# Altium PCB PCB3.PcbDoc
Units mm, origin at the board's own origin, x right, y up, seen from the top; angles counter-clockwise.
Board outline 78.87 x 97.54 mm, 2 copper layers (Top Layer, Bottom Layer); 18 components, 22 nets, 80 pads, 0 vias.
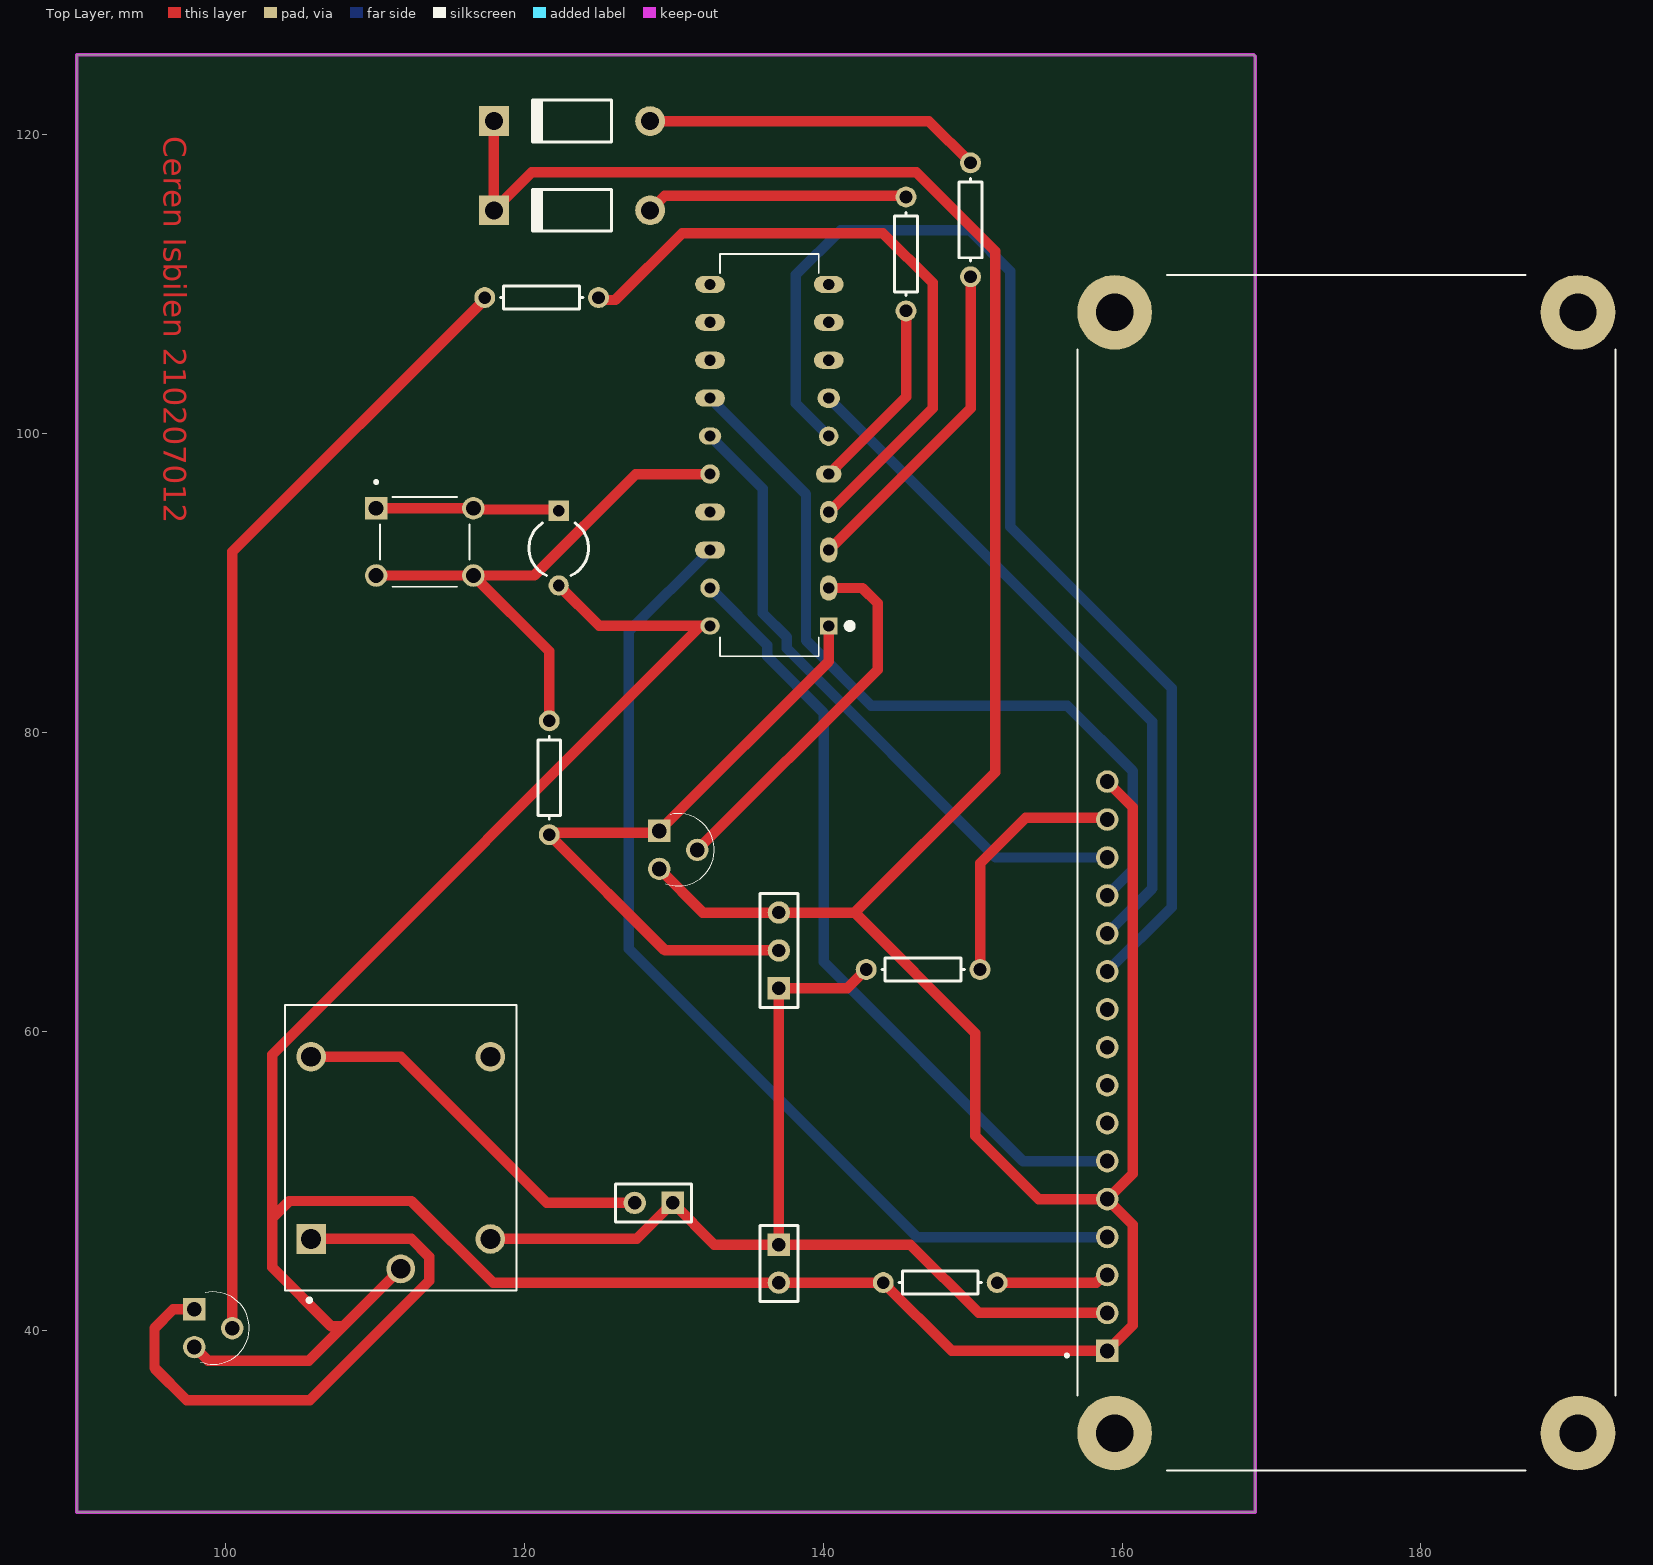
[diagram p0: Top Layer view]
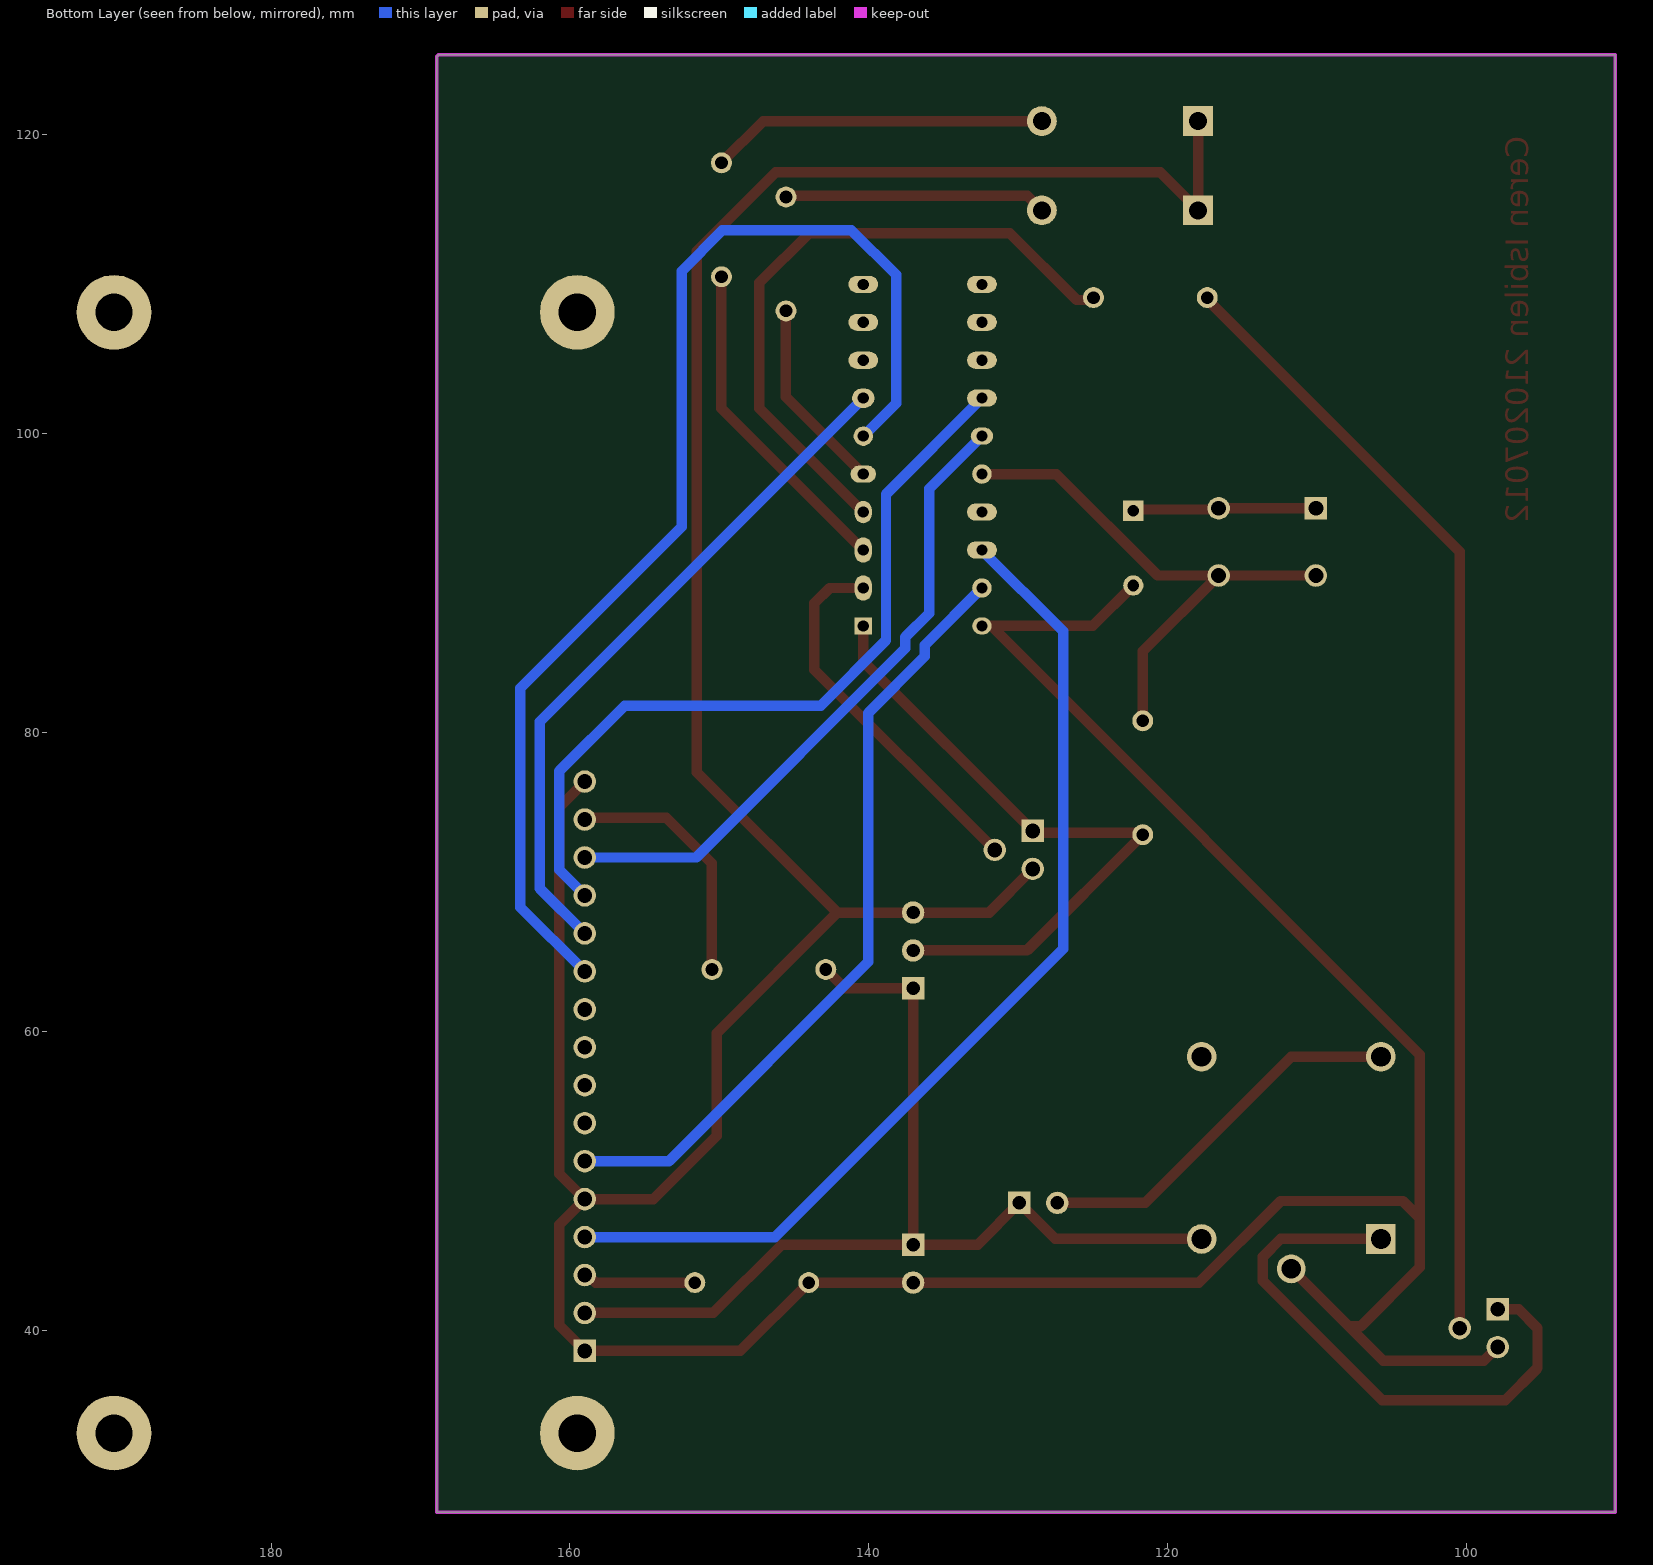
[diagram p1: Bottom Layer view, seen from below]

## Layer stack, top to bottom
Top Solder: solder mask 0.0102, Solder Resist, Dk 3.5
Top Layer: signal copper 0.0356
Dielectric 1: dielectric 0.32, FR-4, Dk 4.8
Bottom Layer: signal copper 0.0356
Bottom Solder: solder mask 0.0102, Solder Resist, Dk 3.5

## Board outline
90.043,27.813 168.91,27.813 168.91,125.222 168.783,125.349 90.043,125.349

## Design rules (kind name [scope] priority, off if disabled: settings)
Clearance [All] p1: gap=0.6 ignorepadtopadclearanceinfootprint=FALSE
PolygonConnect [All] p1: connectstyle=Relief reliefconductorwidth=0.254 reliefentries=4 polygonreliefangle="90 Angle" airgapwidth=0.254
RoutingVias [All] p1: holewidth=0.711 width=1.27 viastyle="Through Hole" minholewidth=0.711 minwidth=1.27 maxholewidth=0.711 maxwidth=1.27
SolderMaskExpansion [All] p1: expansion=0.102 istentingtop=FALSE
Width [All] p1: maxlimit=0.8 minlimit=0.5 preferedwidth=0.7 minimp=50.000000 maximp=50.000000 favimp=50.000000
30 further rules are at their usual default settings.

## Classes and differential pairs
component class Sheet1: " "

## Components (designator, comment, footprint, x,y, rotation, side; value= is the part's Value field where it differs from the comment)
5V_3V3D "Header 3" HDR1X3 137.033,62.865 r90 top
5V_Header "Header 2" HDR1X2 137.033,45.72 r270 top
bc547 "BC547B" TO127P254X732-3 100.457,38.862 r270 top
Buton "TS02-66-95-BK-260-LCR-D" SW_TS02-66-95-BK-260-LCR-D 113.336,92.746 r0 top
C1 "Cap2" CAPR5-4X5 122.301,92.329 r270 top value=100pF
D_Arm "Diode 1N4007" DO-41 123.19,114.935 r180 top
D_Led "Diode 1N4007" DO-41 123.19,120.904 r180 top
Fan_header "Header 2" HDR1X2 129.921,48.514 r180 top
Isı_Sensor "MCP9700" TO127P254X732-3 131.572,70.866 r270 top
LCD3 "" AXIAL-0.3 147.828,43.18 r0 top value=2.2
LCD15 "Res1" AXIAL-0.3 146.685,64.135 r180 top value=33
MSP "MSP430G2553IN20" DIP794W45P254L2692H508Q20 136.398,98.552 r180 top
R_BC "Res1" AXIAL-0.3 121.158,109.093 r0 top value=4.7K
R_Led11 "Res1" AXIAL-0.3 149.86,114.3 r90 top value=1K
R_Led13 "Res1" AXIAL-0.3 145.542,112.014 r90 top value=1K
R_rst "Res1" AXIAL-0.3 121.666,76.962 r270 top value=1K
Role "SRD-05VDC-SL-C" RELAY_SRD-05VDC-SL-C 111.729,52.201 r90 top
U1 "LCD2X16" LCD_LCD2X16 175.004,70.608 r90 top

## Footprints (in the part's own frame and the unit in brackets; to place one, negate y for a bottom-side part, rotate by r counter-clockwise, add the part's x,y. Pads: shape width x height; smd on the part's side, far side on the other; paste and mask are expansions set on the pad)
AXIAL-0.3 [mm] "Axial Device, Thru-Hole; 2 Leads; 0.3 in Pin Spacing"
  round 1.4 hole 0.85: 1(-3.81,0) 2(3.81,0)
  silkscreen extent -2.77,-0.76 2.77,0.76
CAPR5-4X5 [mm] "Capacitor; 2 Leads"
  rect 1.35x1.35 hole 0.8: 1(-2.5,0)
  round 1.35 hole 0.8: 2(2.5,0)
  silkscreen extent -1.69,-2 1.82,2
DIP794W45P254L2692H508Q20 [mm]
  rect 1.14x1.14 hole 0.74: 1(-3.97,11.43)
  oval 1.14x1.7 hole 0.74: 2(-3.97,8.89) 3(-3.97,6.35)
  oval 1.14x1.5 hole 0.74: 4(-3.97,3.81)
  oval 1.7x1.14 hole 0.74: 5(-3.97,1.27)
  round 1.3 hole 0.74: 6(-3.97,-1.27) 16(3.97,1.27) 19(3.97,8.89)
  oval 1.5x1.3 hole 0.74: 7(-3.97,-3.81)
  oval 2x1.14 hole 0.74: 8(-3.97,-6.35) 9(-3.97,-8.89) 10(-3.97,-11.43) 11(3.97,-11.43) 12(3.97,-8.89) 13(3.97,-6.35) 14(3.97,-3.81) 17(3.97,3.81) 18(3.97,6.35)
  oval 1.5x1.14 hole 0.74: 15(3.97,-1.27)
  oval 1.3x1.14 hole 0.74: 20(3.97,11.43)
  silkscreen extent -5.57,-13.46 3.3,13.46
DO-41 [mm] "Diode, Axial; Body 5.2 x 2.7 mm (LxDia. max), Lead Dia. 0.86 mm (max)"
  round 2 hole 1.2: 1(-5.23,0)
  rect 2x2 hole 1.2: 2(5.23,0)
  silkscreen extent -2.65,-1.4 2.75,1.4
HDR1X2 [mm] "Connector; Header; 2 Position"
  rect 1.5x1.5 hole 0.9: 1(0,0)
  round 1.5 hole 0.9: 2(2.54,0)
  silkscreen extent -1.27,-1.27 3.81,1.27
HDR1X3 [mm] "Connector; Header; 3 Position"
  rect 1.5x1.5 hole 0.9: 1(0,0)
  round 1.5 hole 0.9: 2(2.54,0) 3(5.08,0)
  silkscreen extent -1.27,-1.27 6.35,1.27
LCD_LCD2X16 [mm]
  rect 1.508x1.508 hole 1: 1(-32,16)
  round 1.508 hole 1: 2(-29.46,16) 3(-26.92,16) 4(-24.38,16) 5(-21.84,16) 6(-19.3,16) 7(-16.76,16) 8(-14.22,16) 9(-11.68,16) 10(-9.14,16) 11(-6.6,16) 12(-4.06,16) 13(-1.52,16) 14(1.02,16) 15(3.56,16) 16(6.1,16)
  round 5 hole 2.5: S1(-37.5,15.5) S2(37.5,15.5) S3(37.5,-15.5) S4(-37.5,-15.5)
  silkscreen extent -40,-18 40,18.8, body extent -40,-18 40,18, height 7
RELAY_SRD-05VDC-SL-C [mm]
  rect 1.98x1.98 hole 1.32: A1(-6.1,6)
  round 1.98 hole 1.32: A2(-6.1,-6) NC(6.1,6) NO(6.1,-6)
  round 1.935 hole 1.29: COM(-8.1,0)
  silkscreen extent -10.3,-7.75 9.55,7.75, body extent -9.6,-7.8 9.6,7.8, height 15.8
SW_TS02-66-95-BK-260-LCR-D [mm]
  rect 1.508x1.508 hole 1: 1(-3.25,2.25)
  round 1.508 hole 1: 2(3.25,2.25) 3(-3.25,-2.25) 4(3.25,-2.25)
  silkscreen extent -3.35,-3 3,4.1, body extent -3.95,-3 3.95,3, height 9.7
TO127P254X732-3 [mil]
  rect 59x59 hole 39: 1(-100,-100)
  round 59 hole 39: 2(-50,0) 3(0,-100)
  silkscreen extent -146,-83 45,45, body extent -93,-71 93,71, height 210

## Part data
5V_3V3D: "Header, 3-Pin", LatestRevisionDate=17-Jul-2002, LatestRevisionNote="Re-released for DXP Platform.", Publisher="Altium Limited"
5V_Header Fan_header: "Header, 2-Pin", LatestRevisionDate=17-Jul-2002, LatestRevisionNote="Re-released for DXP Platform.", Publisher="Altium Limited"
bc547: "NPN Epitaxial Silicon Transistor", Package=None, Availability=Unavailable, MF="{'manufacturer': u'ON Semiconductor'}", MP=BC547B, Price=None
Buton: Package=None, Availability=Unavailable, MF="{'manufacturer': u'CUI Devices'}", MP=TS02-66-95-BK-260-LCR-D, Price=None
C1: "Capacitor", PackageDescription="Capacitor; 2 Leads", PackageReference=CAPR5-4X5, Published=23-Sep-2002, Publisher="Altium Limited"
D_Arm D_Led: "1 Amp General Purpose Rectifier", Code_JEDEC=DO-204-AL, ComponentLink1Description="Manufacturer Link", ComponentLink1URL=http://www.fairchildsemi.com/, ComponentLink2Description=Datasheet, ComponentLink2URL=http://www.fairchildsemi.com/ds/1N%2F1N4001.pdf, DatasheetVersion=1998, LatestRevisionDate=17-Jul-2002, LatestRevisionNote="Re-released for DXP Platform.", PackageDescription="Diode, Axial; Body 5.2 x 2.7 mm (LxDia. max), Lead Dia. 0.86 mm (max)", PackageReference=DO-41, PackageVersion=Aug-1999, Published=8-Jun-2000, Publisher="Altium Limited"
Isı_Sensor: library part BC547B, "NPN Epitaxial Silicon Transistor", Package=None, Availability=Unavailable, MF="{'manufacturer': u'ON Semiconductor'}", MP=BC547B, Price=None
LCD3: library part Res1, "Resistor", LatestRevisionDate=17-Jul-2002, LatestRevisionNote="Re-released for DXP Platform.", PackageDescription="Axial Device, Thru-Hole; 2 Leads; 0.3 in Pin Spacing", PackageReference=AXIAL-0.3, Published=8-Jun-2000, Publisher="Altium Limited"
LCD15 R_BC R_Led11 R_Led13 R_rst: "Resistor", LatestRevisionDate=17-Jul-2002, LatestRevisionNote="Re-released for DXP Platform.", PackageDescription="Axial Device, Thru-Hole; 2 Leads; 0.3 in Pin Spacing", PackageReference=AXIAL-0.3, Published=8-Jun-2000, Publisher="Altium Limited"
MSP: "MSP430G2x53, MSP430G2x13 Mixed Signal Microcontroller 20-PDIP -40 to 85", Package=None, Availability=Unavailable, MF="{'manufacturer': u'Texas Instruments'}", MP=MSP430G2553IN20, Price=None
Role: "5V Trigger Relay Module For Arduino And Raspberry Pi 5V Trigger Relay Module For Arduino And Raspberry Pi", Package=None, Availability=Unavailable, MF="{'manufacturer': u'Songle Relay'}", MP=SRD-05VDC-SL-C, Price=None
U1: "Display; Display: LCD 2x16 characters (blue backlight)", Package=None, Availability=Unavailable, MF="{'manufacturer': u'mikroElektronika'}", MP=LCD2X16, Price=None

## Nets (pads, with @x,y where several pads share a name; then routed paths per layer and width w, separated by ;. In a path a pad name is that pad's centre, name@x,y a point inside that pad or via, vN(x,y) a via of type N, cw(c..) or ccw(c..) an arc to the next point about the centre after c; other vN are vias at no path point)
3V3: 5V_3V3D.2 Isı_Sensor.1 MSP.1 R_rst.2 | length 44.5
  Top Layer w0.7: 5V_3V3D.2 129.413,65.405 R_rst.2 121.793,73.279 128.905,73.279 Isı_Sensor.1 140.368,84.742 MSP.1
+5: 5V_3V3D.1 5V_Header.1 Fan_header.1 LCD15.2 Role.A2 U1.2 | length 68.8
  Top Layer w0.7: Role.A2 127.508,46.101 Fan_header.1 132.715,45.72 5V_Header.1 ; LCD15.2 141.605,62.865 5V_3V3D.1 5V_Header.1 ; U1.2 150.395,41.148 145.823,45.72 5V_Header.1
But1: Buton.1 Buton.2 C1.1 | length 12.3
  Top Layer w0.7: Buton.1 Buton.2 116.669,94.913 122.218,94.913 C1.1
GND: 5V_3V3D.3 5V_Header.2 bc547.3 C1.2 D_Arm.2 D_Led.2 Isı_Sensor.3 LCD3.1 MSP.20 Role.COM U1.1 U1.5 U1.16 | length 324.6
  Top Layer w0.7: bc547.3 98.834,37.945 105.573,37.945 107.791,40.164 ; Role.COM 107.791,40.164 ; D_Led.2 D_Arm.2 120.499,117.474 146.225,117.474 151.51,112.189 151.51,77.342 142.113,67.945 ; C1.2 125.008,87.122 MSP.20@131.806,87.122 ; Isı_Sensor.3 131.953,67.945 5V_3V3D.3 142.113,67.945 ; MSP.20 MSP.20@131.806,87.122 ; U1.16 160.708,75.004 160.708,50.472 U1.5 ; 103.124,47.498 103.124,58.44 MSP.20@131.806,87.122 ; 103.124,47.498 103.124,44.196 107.061,40.259 107.696,40.259 107.791,40.164 ; 103.124,47.498 104.267,48.641 112.445,48.641 117.906,43.18 5V_Header.2 LCD3.1 148.59,38.608 U1.1 160.708,40.312 160.708,47.064 U1.5 ; 142.113,67.945 150.178,59.88 150.178,53.022 154.432,48.768 U1.5
Netbc547_1: bc547.1 Role.A1 | length 38.5
  Top Layer w0.7: bc547.1 96.52,41.402 95.25,40.132 95.25,37.465 97.403,35.312 105.652,35.312 113.646,43.307 113.646,44.895 112.441,46.101 Role.A1
Netbc547_2: bc547.2 R_BC.1 | length 75.8
  Top Layer w0.7: bc547.2 100.457,92.075 R_BC.1@117.348,108.966
NetD_Arm_1: D_Arm.1 R_Led13.2 | length 17.6
  Top Layer w0.7: D_Arm.1 129.389,115.904 145.462,115.904 R_Led13.2
NetD_Led_1: D_Led.1 R_Led11.2 | length 22.6
  Top Layer w0.7: D_Led.1 147.066,120.904 R_Led11.2
NetFan_header_2: Fan_header.2 Role.NC | length 25.7
  Top Layer w0.7: Role.NC 111.726,58.301 121.513,48.514 Fan_header.2
NetLCD3_2: LCD3.2 U1.3 | length 7.6
  Top Layer w0.7: LCD3.2 158.277,43.18 158.785,43.688 U1.3
NetLCD15_1: LCD15.1 U1.15 | length 16.9
  Top Layer w0.7: LCD15.1 150.495,71.247 153.543,74.295 158.877,74.295 U1.15
P1.0: Isı_Sensor.2 MSP.2 | length 25.2
  Top Layer w0.7: Isı_Sensor.2 143.637,84.201 143.637,88.646 142.621,89.662 MSP.2
P1.1: MSP.3 R_Led11.1 | length 22.2
  Top Layer w0.7: MSP.3 149.86,101.694 R_Led11.1
P1.2: MSP.4 R_BC.2 | length 43.8
  Top Layer w0.7: R_BC.2@124.968,108.966 125.002,108.932 126.077,108.932 130.556,113.411 143.989,113.411 147.32,110.08 147.32,101.694 MSP.4
P1.3: MSP.5 R_Led13.1 | length 13.1
  Top Layer w0.7: MSP.5 145.542,102.456 R_Led13.1
P1.4: MSP.6 U1.11 | length 81.5
  Bottom Layer w0.7: MSP.6 138.176,102.014 138.176,110.617 141.16,113.602 149.796,113.602 152.527,110.871 152.527,93.747 163.308,82.966 163.308,68.312 U1.11
P1.5: MSP.7 U1.12 | length 46
  Bottom Layer w0.7: MSP.7 162.008,80.722 162.008,69.552 U1.12
P1.6: MSP.14 U1.13 | length 53.4
  Bottom Layer w0.7: MSP.14 138.848,95.942 138.848,86.158 143.22,81.786 156.336,81.786 160.708,77.414 160.708,70.792 U1.13
P1.7: MSP.15 U1.14 | length 43.6
  Bottom Layer w0.7: MSP.15 135.958,96.292 135.958,87.97 137.548,86.38 137.548,85.62 151.54,71.628 U1.14
P2.6: MSP.19 U1.6 | length 52.7
  Bottom Layer w0.7: MSP.19 136.248,85.842 136.248,85.082 140.033,81.297 140.033,64.644 153.369,51.308 U1.6
P2.7: MSP.18 U1.4 | length 68.9
  Bottom Layer w0.7: MSP.18 127,86.774 127,65.532 146.304,46.228 U1.4
RST: Buton.3 Buton.4 MSP.16 R_rst.1 | length 37
  Top Layer w0.7: Buton.3 Buton.4 ; R_rst.1 121.666,85.416 Buton.4 ; MSP.16 127.456,97.282 120.67,90.496 Buton.4
pads on no net: MSP.8 MSP.9 MSP.10 MSP.11 MSP.12 MSP.13 MSP.17 Role.NO U1.7 U1.8 U1.9 U1.10 U1.S1 U1.S2 U1.S3 U1.S4

## Keep-outs
Keep-Out Layer:
  lines w0.254: 90.043,27.813 90.043,125.349 92.456,125.349 163.195,125.349 168.783,125.349 168.91,125.222 168.91,27.813 90.043,27.813

## Other copper
Top Layer:
  text "Ceren Isbilen 210207012" at 95.877,119.896 h1.52 r270